# Altium PCB Display.PcbDoc
Units mil, origin at the board's own origin, x right, y up, seen from the top; angles counter-clockwise.
Board outline 6000 x 4000 mil, 2 copper layers (Top Layer, Bottom Layer); 13 components, 44 nets, 128 pads, 0 vias.
Unrouted connection lines stored in the file: 55.
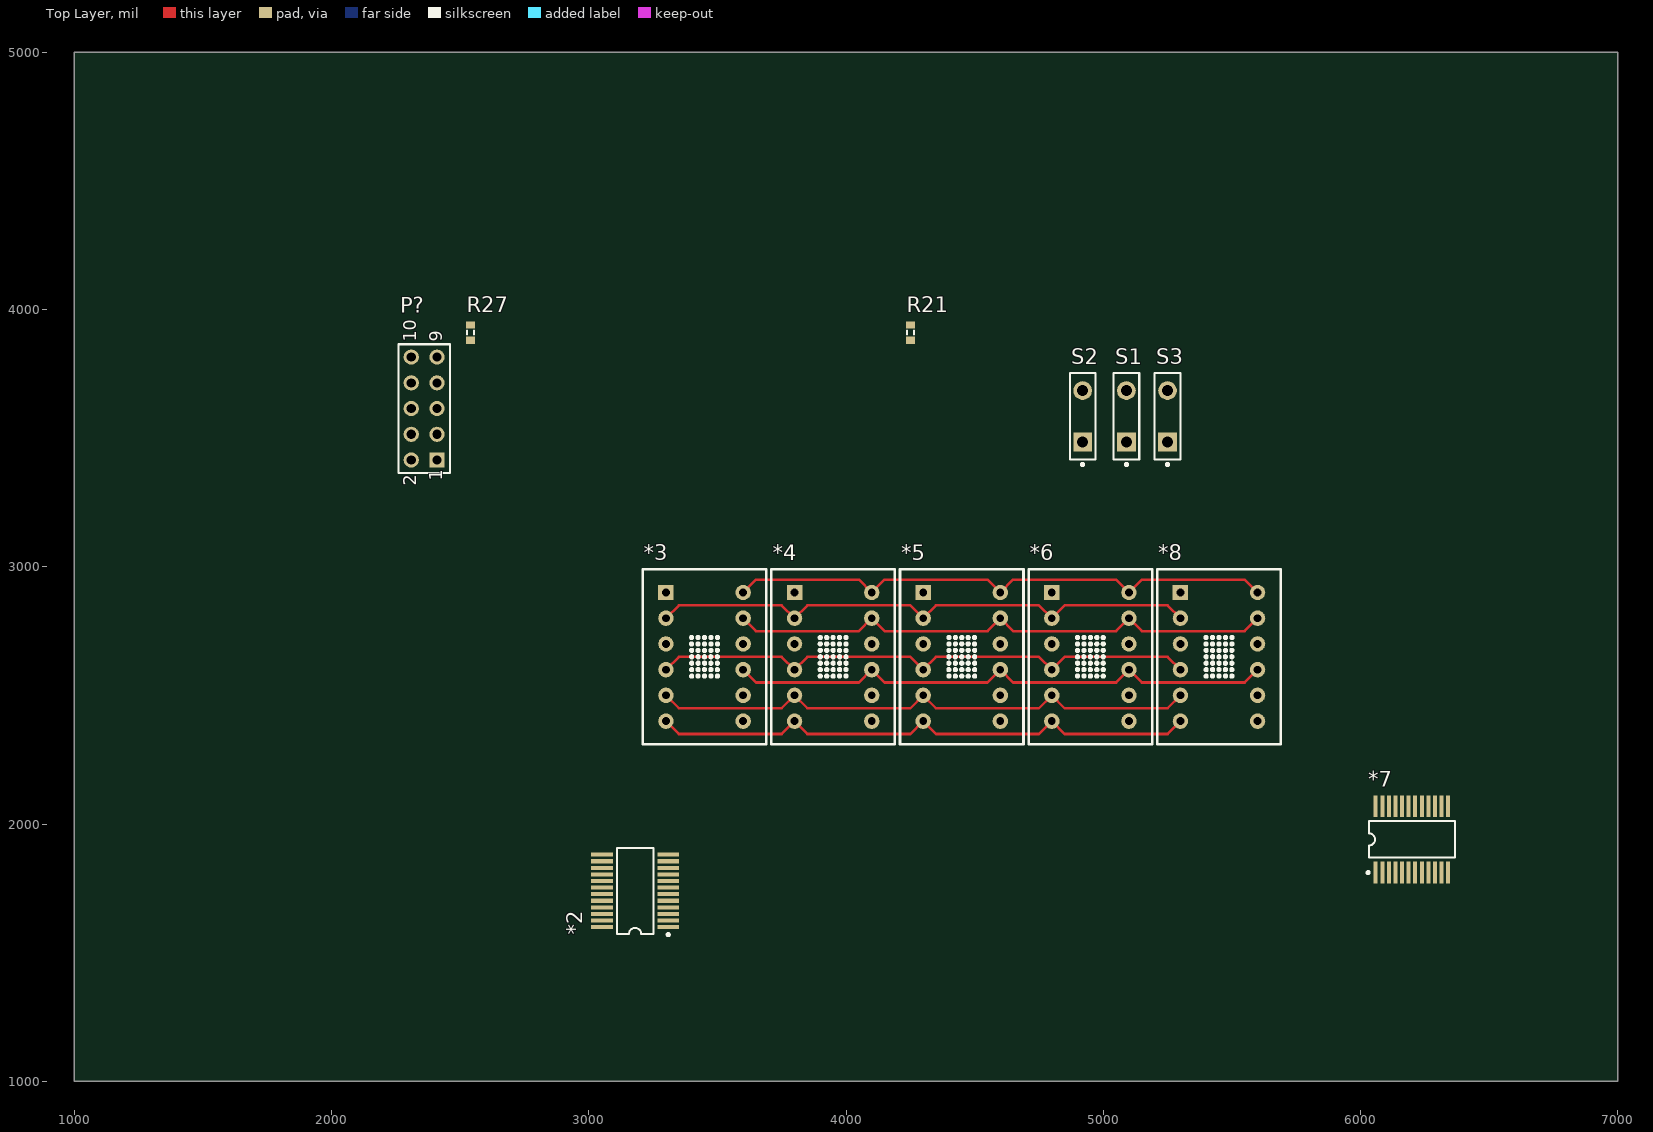
[diagram p0: Top Layer view]
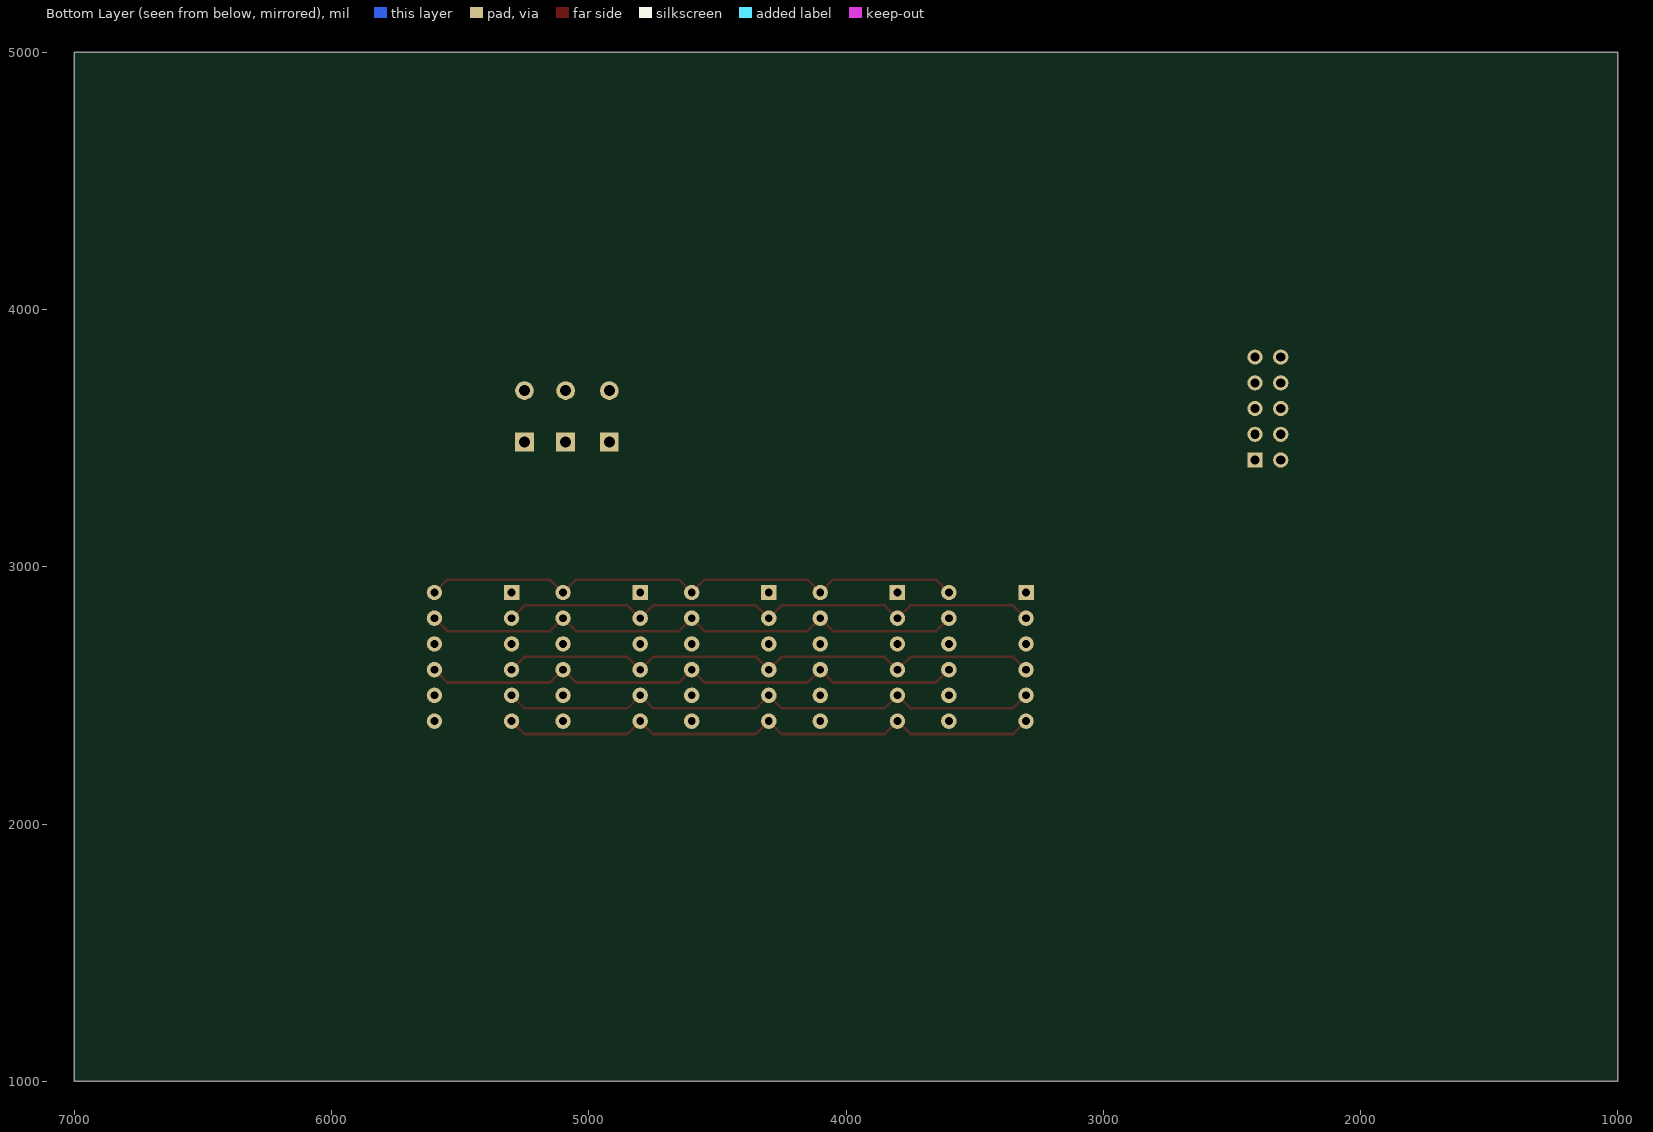
[diagram p1: Bottom Layer view, seen from below]

## Layer stack, top to bottom
Top Layer: signal copper 1.4
Dielectric: dielectric 12.6, FR-4, Dk 4.8
Bottom Layer: signal copper 1.4

## Board outline
1000,1000 7000,1000 7000,5000 1000,5000

## Design rules (kind name [scope] priority, off if disabled: settings)
Clearance [All] p1: gap=10
PolygonConnect [All] p1: connectstyle=Relief reliefconductorwidth=10 reliefentries=4 polygonreliefangle="90 Angle"
RoomDefinition Display [InComponentClass('Display')] p1: confinementstyle=ConfineOut formatcopy=TRUE lockcomponents=FALSE outline 1710,4585 6380,4585 6380,5385 1710,5385
RoutingVias [All] p1: holewidth=28 width=50 viastyle="Through Hole" minholewidth=28 minwidth=50 maxholewidth=28 maxwidth=50
SMDNeckDown [All] p1: percent=50.000
SilkscreenOverComponentPads [All] p1: minsilkscreentomaskgap=10
SolderMaskExpansion [All] p1: expansion=4
Width [All] p1: maxlimit=20 minlimit=1 preferedwidth=10
27 further rules are at their usual default settings.

## Components (designator, comment, footprint, x,y, rotation, side; value= is the part's Value field where it differs from the comment)
*2 "STP16C596" DB024 3180,1740 r90 top
*3 "BL-M07A571" "LED matrix 7x5" 3300,2900 r0 top
*4 "BL-M07A571" "LED matrix 7x5" 3800,2900 r0 top
*5 "BL-M07A571" "LED matrix 7x5" 4300,2900 r0 top
*6 "BL-M07A571" "LED matrix 7x5" 4800,2900 r0 top
*7 "STP16C596" DB024 6200,1940 r0 top
*8 "BL-M07A571" "LED matrix 7x5" 5300,2900 r0 top
P? "Header 5X2" HDR2X5 2410,3415 r90 top
R21 "Res3" RESC1608L 4250,3910 r90 top
R27 "Res3" RESC1608L 2540,3910 r90 top
S1 "SW-PB" SPST-2 5090,3585 r90 top
S2 "SW-PB" SPST-2 4920,3585 r90 top
S3 "SW-PB" SPST-2 5250,3585 r90 top

## Footprints (in the part's own frame and the unit in brackets; to place one, negate y for a bottom-side part, rotate by r counter-clockwise, add the part's x,y. Pads: shape width x height; smd on the part's side, far side on the other; paste and mask are expansions set on the pad)
DB024 [mm] "SSOP, Plastic; 24 Leads; Body Width 5.3 mm; Pitch 0.65 mm"
  rect 0.4x2.15 smd: 1(-3.575,-3.275) 2(-2.925,-3.275) 3(-2.275,-3.275) 4(-1.625,-3.275) 5(-0.975,-3.275) 6(-0.325,-3.275) 7(0.325,-3.275) 8(0.975,-3.275) 9(1.625,-3.275) 10(2.275,-3.275) 11(2.925,-3.275) 12(3.575,-3.275) 13(3.575,3.275) 14(2.925,3.275) 15(2.275,3.275) 16(1.625,3.275) 17(0.975,3.275) 18(0.325,3.275) 19(-0.325,3.275) 20(-0.975,3.275) 21(-1.625,3.275) 22(-2.275,3.275) 23(-2.925,3.275) 24(-3.575,3.275)
  silkscreen extent -4.45,-3.4 4.25,1.8
HDR2X5 [mm] "Connector; Header; 5x2 Position"
  rect 1.5x1.5 hole 0.9: 1(0,0)
  round 1.5 hole 0.9: 2(0,2.54) 3(2.54,0) 4(2.54,2.54) 5(5.08,0) 6(5.08,2.54) 7(7.62,0) 8(7.62,2.54) 9(10.16,0) 10(10.16,2.54)
  silkscreen extent -1.27,-1.27 11.43,3.81
"LED matrix 7x5" [mil] "LED matrix 7x5"
  rect 60x60 hole 30: 1(0,0)
  round 60 hole 30: 2(0,-100) 3(0,-200) 4(0,-300) 5(0,-400) 6(0,-500) 7(300,-500) 8(300,-400) 9(300,-300) 10(300,-200) 11(300,-100) 12(300,0)
  silkscreen extent -90,-590 390,90, body extent -90,-590 390,90, height 250
RESC1608L [mm] "Chip Resistor, Body 1.6x0.8mm, IPC High Density"
  rect 0.7x0.9 smd: 1(-0.75,0) 2(0.75,0)
  silkscreen extent -0.2,-0.35 0.2,0.35, body extent -0.85,-0.48 0.85,0.48, height 0.9
SPST-2 [mm] "Circuit Breaker; 2 Leads"
  rect 1.85x1.85 hole 1.1: 1(-2.54,0)
  round 1.85 hole 1.1: 2(2.54,0)
  silkscreen extent -4.89,-1.27 4.28,1.27

## Part data
P?: "Header, 5-Pin, Dual row"
R21 R27: "Resistor"
S1 S2 S3: "Switch"

## Nets (pads, with @x,y where several pads share a name; then routed paths per layer and width w, separated by ;. In a path a pad name is that pad's centre, name@x,y a point inside that pad or via, vN(x,y) a via of type N, cw(c..) or ccw(c..) an arc to the next point about the centre after c; other vN are vias at no path point)
GND: *2.1 *7.1 P?.6 P?.10 R21.1 R27.1 S1.1 S2.1 S3.2
Net*2_2: *2.2 P?.5
Net*2_3: *2.3 *7.3 P?.3
Net*2_4: *2.4 *7.4 P?.4
Net*2_5: *2.5 *3.12 *4.12 *5.12 *6.12 *8.12 | length 2165.7
  Top Layer w10: *3.12 3650,2950 4050,2950 *4.12 4150,2950 4550,2950 *5.12 4650,2950 5050,2950 *6.12 5150,2950 5550,2950 *8.12
Net*2_6: *2.6 *3.11 *4.11 *5.11 *6.11 *8.11 | length 2165.7
  Top Layer w10: *3.11 3650,2750 4050,2750 *4.11 4150,2750 4550,2750 *5.11 4650,2750 5050,2750 *6.11 5150,2750 5550,2750 *8.11
Net*2_7: *2.7 *3.2 *4.2 *5.2 *6.2 *8.2 | length 2165.7
  Top Layer w10: *3.2 3350,2850 3750,2850 *4.2 3850,2850 4250,2850 *5.2 4350,2850 4750,2850 *6.2 4850,2850 5250,2850 *8.2
Net*2_8: *2.8 *3.9 *4.9 *5.9 *6.9 *8.9 | length 2165.7
  Top Layer w10: *3.9 3650,2550 4050,2550 *4.9 4150,2550 4550,2550 *5.9 4650,2550 5050,2550 *6.9 5150,2550 5550,2550 *8.9
Net*2_9: *2.9 *3.4 *4.4 *5.4 *6.4 *8.4 | length 2165.7
  Top Layer w10: *3.4 3350,2650 3750,2650 *4.4 3850,2650 4250,2650 *5.4 4350,2650 4750,2650 *6.4 4850,2650 5250,2650 *8.4
Net*2_10: *2.10 *3.5 *4.5 *5.5 *6.5 *8.5 | length 2165.7
  Top Layer w10: *3.5 3350,2450 3750,2450 *4.5 3850,2450 4250,2450 *5.5 4350,2450 4750,2450 *6.5 4850,2450 5250,2450 *8.5
Net*2_11: *2.11 *3.6 *4.6 *5.6 *6.6 *8.6 | length 2165.7
  Top Layer w10: *3.6 3350,2350 3750,2350 *4.6 3850,2350 4250,2350 *5.6 4350,2350 4750,2350 *6.6 4850,2350 5250,2350 *8.6
Net*2_12: *2.12 *3.1
Net*2_13: *2.13 *3.3
Net*2_14: *2.14 *3.10
Net*2_15: *2.15 *3.7
Net*2_16: *2.16 *3.8
Net*2_17: *2.17 *4.1
Net*2_18: *2.18 *4.3
Net*2_19: *2.19 *4.10
Net*2_20: *2.20 *4.7
Net*2_21: *2.21 *7.21 P?.2
Net*2_22: *2.22 *7.2
Net*2_23: *2.23 R21.2
Net*4_8: *4.8 *7.5
Net*5_1: *5.1 *7.6
Net*5_3: *5.3 *7.7
Net*5_7: *5.7 *7.9
Net*5_8: *5.8 *7.10
Net*5_10: *5.10 *7.8
Net*6_1: *6.1 *7.11
Net*6_3: *6.3 *7.12
Net*6_7: *6.7 *7.14
Net*6_8: *6.8 *7.15
Net*6_10: *6.10 *7.13
Net*7_16: *7.16 *8.1
Net*7_17: *7.17 *8.3
Net*7_18: *7.18 *8.10
Net*7_19: *7.19 *8.7
Net*7_20: *7.20 *8.8
Net*7_23: *7.23 R27.2
NetP?_7: P?.7 S1.2
NetP?_8: P?.8 S3.1
NetP?_9: P?.9 S2.2
VCC: *2.24 *7.24 P?.1
pads on no net: *7.22

## Text inside footprints (layer, text, board x,y; h text height)
P?: Top Overlay "10" at 2330,3875 h50 r90; Top Overlay "9" at 2430,3875 h50 r90; Top Overlay "1" at 2430,3335 h50 r90; Top Overlay "2" at 2330,3315 h50 r90